# Altium PCB PCB5.PcbDoc
Units mm, origin at the board's own origin, x right, y up, seen from the top; angles counter-clockwise.
Board outline 22.5 x 21.75 mm, 2 copper layers (Top Layer, Bottom Layer); 20 components, 13 nets, 57 pads, 0 vias.
Unrouted connection lines stored in the file: 32.
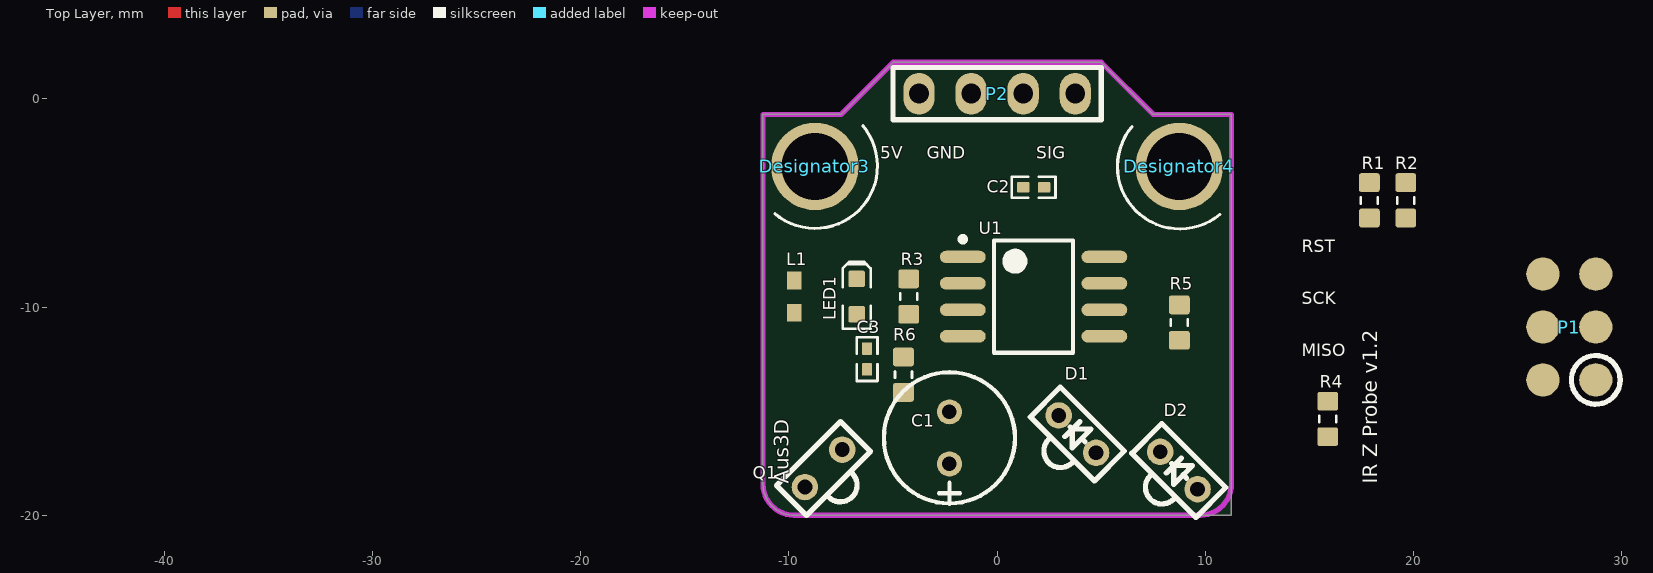
[diagram p0: Top Layer view]
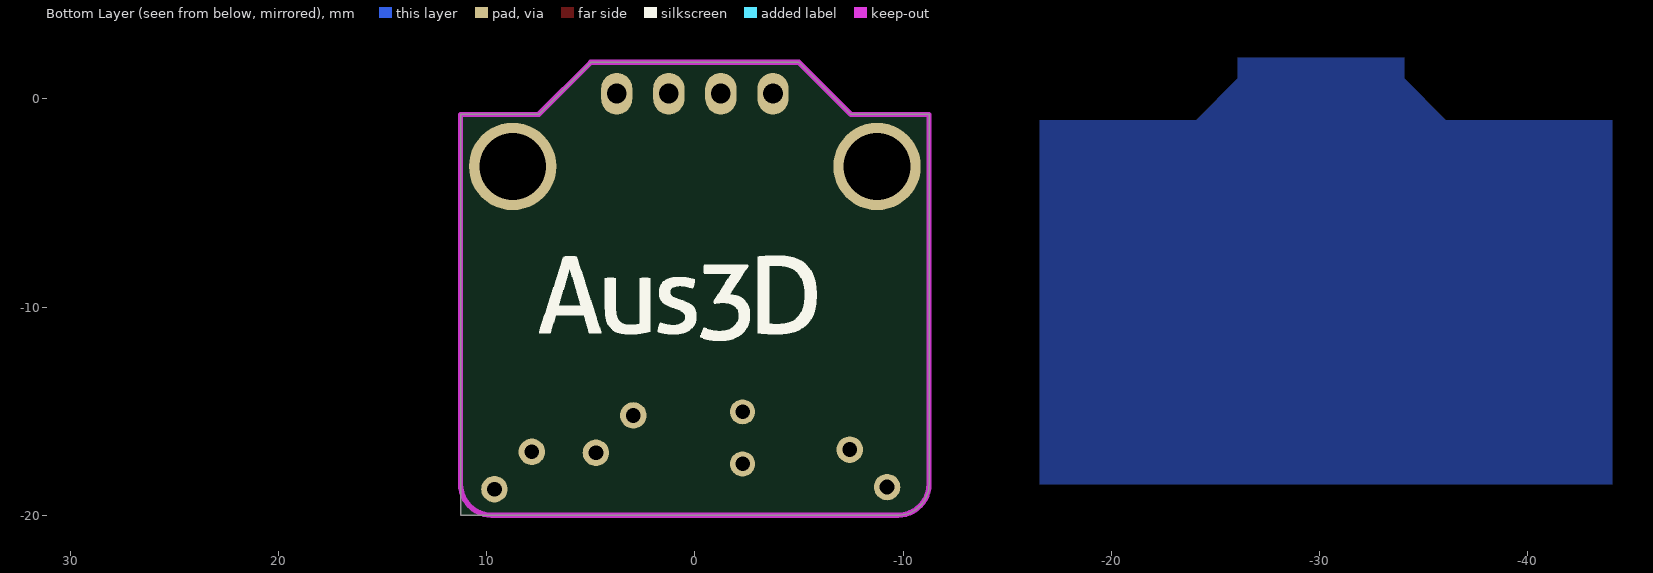
[diagram p1: Bottom Layer view, seen from below]

## Layer stack, top to bottom
Top Solder: solder mask 0.0102, Solder Resist, Dk 3.5
Top Layer: signal copper 0.0356
Dielectric1: dielectric 0.32, FR-4, Dk 4.8
Bottom Layer: signal copper 0.0356
Bottom Solder: solder mask 0.0102, Solder Resist, Dk 3.5

## Board outline
-11.25,-18.5 ccw(c-9.75,-18.5) -9.75,-20 11.25,-20 11.25,-0.75 7.5,-0.75 5,1.75 -5,1.75 -7.5,-0.75 -11.25,-0.75

## Design rules (kind name [scope] priority, off if disabled: settings)
Clearance [All] p1: gap=0.25
FabricationTestPointUsage TestPointUsage [All] p1: valid=0 allowmultiple=FALSE
FabricationTestpoint Testpoint [All] p1: side=3 testpointundercomponent=TRUE minsize=1.016 maxsize=2.54 preferedsize=1.524 minholesize=0 maxholesize=1.016 preferedholesize=0.813 testpointgrid=0.025 allowsidetop=TRUE allowsidebottom=TRUE usegrid=TRUE gridtolerance=0
HoleSize [All] p1: absolutevalues=TRUE maxlimit=4 minlimit=0.025 maxpercent=80.000 minpercent=20.000
PolygonConnect [All] p1: connectstyle=Relief reliefconductorwidth=0.254 reliefentries=4 polygonreliefangle="90 Angle" airgapwidth=0.254
RoutingVias [All] p1: holewidth=0.6 width=1 viastyle="Through Hole" minholewidth=0.6 minwidth=1 maxholewidth=0.6 maxwidth=1
SilkToSolderMaskClearance SilkscreenOverComponentPads [IsPad] p1: minsilkscreentomaskgap=0.254 clearancetoexposedcopper=TRUE
SolderMaskExpansion [All] p1: expansion=0.102
Width Width_Power [(InNet('5V') OR InNet('GND') OR InNet('VCC'))] p1: maxlimit=0.5 minlimit=0.25 preferedwidth=0.5 minimp=50.000000 maximp=50.000000 favimp=50.000000
Width [All] p2: maxlimit=0.25 minlimit=0.2 preferedwidth=0.25 minimp=50.000000 maximp=50.000000 favimp=50.000000
26 further rules are at their usual default settings.

## Classes and differential pairs
component class board2: C1 C2 C3 D1 D2 L1 LED1 P1 P2 Q1 R1 R2 R3 R4 R5 R6 U1

## Components (designator, comment, footprint, x,y, rotation, side; value= is the part's Value field where it differs from the comment)
C1 "100µ" 6.3-DIA-CAP -2.292,-15.035 r270 top
C2 "100n" CAPC1005X55N 1.75,-4.25 r0 top
C3 "1n" CAPC1005X55N -6.25,-12.5 r90 top
D1 "GL480E" LED-2.54spacing 4.75,-17 r135 top
D2 "GL480E" LED-2.54spacing 9.625,-18.75 r135 top
Designator3 "Comment" M3-Hole -8.75,-3.25 r0 top
Designator4 "Comment" M3-Hole 8.75,-3.25 r270 top
L1 "7447965" SMD-0603 -9.75,-9.5 r270 top
LED1 "Red" LED-0603-RED -6.75,-9.5 r90 top
P1 "ICSP" "ICSP Pads - SMD" 28.75,-13.5 r180 top
P2 "Header 4" JST-4P 3.75,0.25 r180 top
Q1 "SFH3100F" SFH3100F-footprint -7.44,-16.85 r225 top
R1 "Thick Film" RESC1608X55N 17.875,-4.875 r270 top
R2 "Thick Film" RESC1608X55N 19.625,-4.875 r270 top
R3 "Thick Film" RESC1608X55N -4.25,-9.5 r90 top
R4 "Thick Film" RESC1608X55N 15.875,-15.375 r90 top
R5 "Thick Film" RESC1608X55N 8.75,-10.75 r90 top
R6 "Thick Film" RESC1608X55N -4.5,-13.25 r270 top
U1 "ATtiny45-20SH" 8S2_N 1.75,-9.5 r0 top
? "" AUS3D-LOGO-BACK 1.125,-9.76 r0 top

## Footprints (in the part's own frame and the unit in brackets; to place one, negate y for a bottom-side part, rotate by r counter-clockwise, add the part's x,y. Pads: shape width x height; smd on the part's side, far side on the other; paste and mask are expansions set on the pad)
6.3-DIA-CAP [mm]
  round 1.2 hole 0.7: 1(2.5,0) 2(0,0)
  silkscreen extent -1.9,-3.15 4.42,3.15
8S2_N [mm] "SOP, 8-Leads, Body 5.3x5.3mm, Pitch 1.27mm, IPC Medium Density"
  oval 2.2x0.6 smd: 1(-3.4,1.905) 2(-3.4,0.635) 3(-3.4,-0.635) 4(-3.4,-1.905) 5(3.4,-1.905) 6(3.4,-0.635) 7(3.4,0.635) 8(3.4,1.905)
  silkscreen extent -3.52,-2.7 1.9,2.88, body extent -2.7,-2.68 2.7,2.68, height 2.16
AUS3D-LOGO-BACK [mm]
CAPC1005X55N [mm] "Chip Capacitor, Body 1.0x0.5mm, EIA 0402, IPC Medium Density"
  round 0.2 on Mech15: 0(0,0)
  rrect20% 0.6x0.5 smd: 1(-0.5,0) 2(0.5,0)
  Top Layer pour cut-out: -0.325,0.375 -0.2,0.5 0.2,0.5 0.325,0.375 0.325,-0.375 0.2,-0.5 -0.2,-0.5 -0.325,-0.375
  silkscreen extent -1.05,-0.5 1.05,0.5, body extent -0.52,-0.27 0.53,0.28, height 0.55
"ICSP Pads - SMD" [mm]
  round 1.6 / inner round 1.6 / far side round 0 all layers, no hole: 1(0,0) 2(2.54,0) 3(0,-2.54) 4(2.54,-2.54) 5(0,-5.08) 6(2.54,-5.08)
  silkscreen extent -1.17,-1.17 1.17,1.17
JST-4P [mm]
  oval 1.5x2 hole 0.95: 1(0,0) 2(2.5,0) 3(5,0) 4(7.5,0)
  silkscreen extent -1.25,-1.25 8.75,1.25
LED-2.54spacing [mil]
  round 50 hole 28: 1(100,0) 2(0,0)
  silkscreen extent -35,-40 136,76
LED-0603-RED [mm]
  round 0.254 on Mech15: 0(0,0)
  rrect25% 0.8x0.8 smd: A(-0.85,0) K(0.85,0)
  Top Layer pour cut-out: -0.5,0.5 0.5,0.5 0.5,-0.5 -0.5,-0.5
  silkscreen extent -1.55,-0.67 1.68,0.67, body extent -0.8,-0.4 0.8,0.4, height 0.75
M3-Hole [mm]
  round 4.2 hole 3.2: M3(0,0)
  silkscreen extent -1.93,-2.97 3,1.96
RESC1608X55N [mm] "Chip Resistor, Body 1.6x0.8mm, EIA 0603, IPC Medium Density"
  round 0.254 on Mech15: 0(0,0)
  rrect25% 0.9x1 smd: 1(-0.85,0) 2(0.85,0)
  Top Layer pour cut-out: -0.6,0.5 -0.4,0.7 0.4,0.7 0.6,0.5 0.6,-0.5 0.4,-0.7 -0.4,-0.7 -0.6,-0.5
  silkscreen extent -0.15,-0.41 0.15,0.41, body extent -0.87,-0.47 0.88,0.48, height 0.54
SFH3100F-footprint [mil]
  round 50 hole 28: 1(0,0) 2(100,0)
  silkscreen extent -35,-40 136,76
SMD-0603 [mm] "Chip Inductor, 2-Leads, Body 1.6x0.8mm"
  rect 0.85x0.7 smd: 1(-0.775,0) 2(0.775,0)
  body extent -0.8,-0.4 0.8,0.4, height 0.95

## Part data
C1: library part CAPE_100u_16V_THD, "Capacitor THD Electrolytic 100uF 20% 16V Radial"
C2: library part CAPC_100n_0402_X5R_16V_10%, "Capacitor SMD Cer 100nF 10% 16V X5R 0402"
C3: library part CAPC_1n_0402_X7R_16V_10%, "Capacitor SMD Cer 1nF 10% 16V X7R 0402"
L1: "SMD-Multilayer Inductor WE-MI, L = 1.00 µH"
LED1: library part LED_SMD_Red_0603_220mcd, "LED 0603 SMD Hyper Red 630nm 220mcd 20mA"
P1: library part "Header 3X2", "Header, 3-Pin, Dual row"
P2: "Header, 4-Pin"
Q1: "GL480E"
R1 R2 R4 R5 R6: library part RES_2K2_0603_5%, "Resistor SMD chip 2.2k Ohm 0.1W 5% 0603"
R3: library part RES_330R_0603_5%, "Resistor SMD chip 330 Ohm 0.1W 5% 0603"
U1: "8-bit AVR Microcontroller, 20MHz, 2.7-5.5V, 4K Flash, 256 Bytes EEPROM, 256 Bytes SRAM, Industrial Grade (-40°C to 85°C), 8-Lead SOIC, Pb-Free"

## Nets (pads, with @x,y where several pads share a name; then routed paths per layer and width w, separated by ;. In a path a pad name is that pad's centre, name@x,y a point inside that pad or via, vN(x,y) a via of type N, cw(c..) or ccw(c..) an arc to the next point about the centre after c; other vN are vias at no path point)
5V: C1.1 C2.2 L1.2 P1.2 Q1.1 U1.8
GND: C1.2 C2.1 C3.2 D1.1 D2.1 LED1.K P1.6 P2.3 R6.1 U1.4
NetC3_1: C3.1 Q1.2 R6.2 U1.3
NetD1_2: D1.2 R5.1
NetD2_2: D2.2 R4.1
NetLED1_A: LED1.A R3.2
NetP1_1: P1.1 R5.2 U1.6
NetP1_3: P1.3 R2.2 U1.7
NetP1_4: P1.4 R4.2 U1.5
NetP1_5: P1.5 U1.1
NetR1_2: R1.2 R3.1 U1.2
SIG: P2.1 R1.1 R2.1
VCC: L1.1 P2.4
pads on no net: C2.0 C3.0 Designator3.M3 Designator4.M3 LED1.0 P2.2 R1.0 R2.0 R3.0 R4.0 R5.0 R6.0

## Polygon pours and split planes (outlines as drawn)
GND on Bottom Layer "GND - BottomLayer" (solid, pour order 2): -44.071,-1.019 -44.071,-18.519 -16.571,-18.519 -16.571,-1.019 -24.071,-1.019 -26.071,0.981 -26.071,1.981 -34.071,1.981 -34.071,0.981 -36.071,-1.019

## Keep-outs
Keep-Out Layer:
  lines w0.254: -11.25,-18.5 ccw(c-9.75,-18.5) -9.75,-20 9.75,-20 ccw(c9.75,-18.5) 11.25,-18.5 11.25,-0.75 7.5,-0.75 5,1.75 -5,1.75 -7.5,-0.75 -11.25,-0.75 -11.25,-18.5

## Silkscreen, mask and mechanical layers (free items; w line width, h text height)
Top Overlay:
  text "5V" at -5.625,-2.875 h0.6
  text "GND" at -3.375,-2.875 h0.6
  text "SIG" at 1.875,-2.875 h0.6
  text "RST" at 14.625,-7.375 h0.6
  text "SCK" at 14.625,-9.875 h0.6
  text "MISO" at 14.625,-12.375 h0.6
  text "Aus3D" at -10,-18.5 h0.7 r90
  text "IR Z Probe v1.2" at 18.25,-18.5 h0.7 r90
Mechanical 16:
  drawing of 1874 lines, arcs and shapes, not listed
  text "1" at -109.379,78.861 h0.6
  text "2" at -36.735,78.861 h0.6
  text "3" at 36.417,78.861 h0.6
  text "4" at 109.315,78.861 h0.6
  text "A" at -143.72,55.849 h0.6
  text "A" at 143.3,55.849 h0.6
  text "B" at -143.72,7.792 h0.6
  text "B" at 143.3,7.792 h0.6
  text "C" at -143.72,-40.722 h0.6
  text "C" at 143.3,-40.722 h0.6
  text "ENGINEER:" at 28.365,-77.73 h0.6
  text "TITLE:" at 66.465,-77.73 h0.6
  text "PCB DESIGNER:" at 28.365,-85.223 h0.6
  text "D" at -143.72,-88.728 h0.6
  text "D" at 143.3,-88.728 h0.6
  text "DATE:" at 28.365,-92.97 h0.6
  text "PART NO.:" at 66.465,-92.97 h0.6
  text "REV:" at 119.805,-92.97 h0.6
  text "Altium Limited" at -4.655,-95.51 h0.6
  text ".PRINT_DATE" at 29.635,-96.018 h0.6
  text "12a Rodborough Rd" at -4.655,-98.05 h0.6
  text "Frenchs Forest" at -4.655,-100.59 h0.6
  text "FILE NAME:" at 28.365,-100.59 h0.6
  text "DWG NO:" at 66.465,-100.59 h0.6
  text "SCALE:" at 119.805,-100.59 h0.6
  text "NSW 2086" at -4.655,-103.13 h0.6
  text ".PCB_FILE_NAME_NO_PATH" at 29.635,-103.638 h0.6
  text "1" at -109.379,-109.099 h0.6
  text "2" at -36.735,-109.099 h0.6
  text "3" at 36.417,-109.099 h0.6
  text "4" at 109.315,-109.099 h0.6